# Altium PCB NEW_PCB_2022-07-23.pcbdoc
Units mil, origin at the board's own origin, x right, y up, seen from the top; angles counter-clockwise.
Board outline 2362.21 x 1275.02 mil, 2 copper layers (Top Layer, Bottom Layer); 1 components, 0 nets, 62 pads, 0 vias.
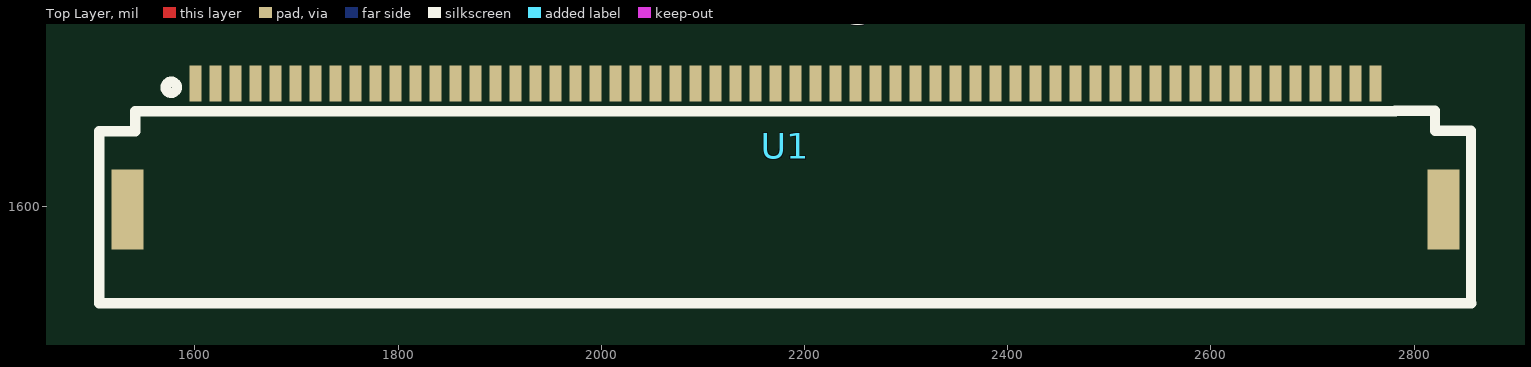
[diagram p0: Top Layer view]
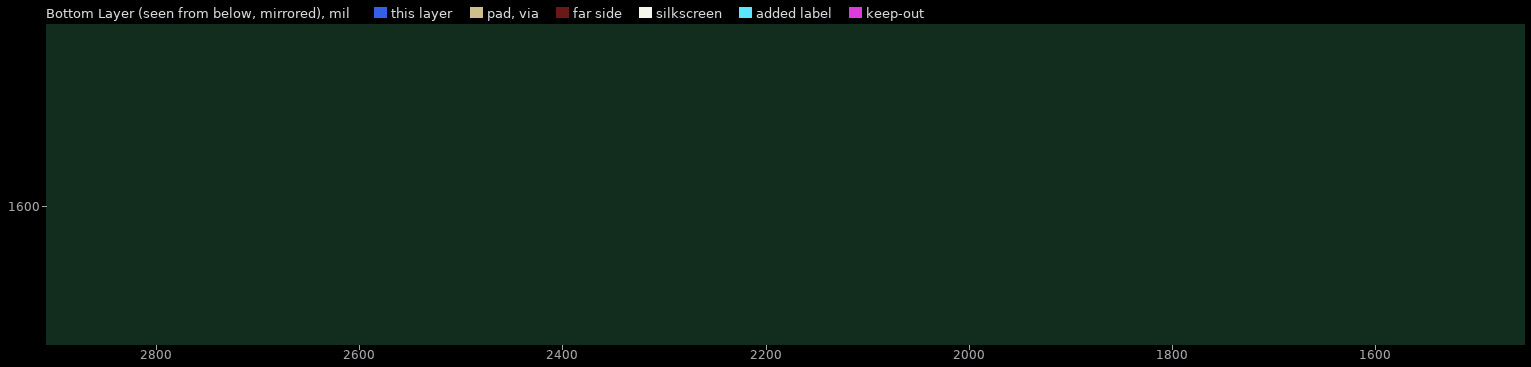
[diagram p1: Bottom Layer view, seen from below]

## Layer stack, top to bottom
Top Solder: solder mask 0.4, Solder Resist, Dk 3.5
Top Layer: signal copper 1.4
Dielectric1: dielectric 12.6, FR-4, Dk 4.8
Bottom Layer: signal copper 1.4
Bottom Solder: solder mask 0.4, Solder Resist, Dk 3.5

## Board outline
3362.21,1000 1000,1000 1000,2275.02 3362.21,2275.02

## Design rules (kind name [scope] priority, off if disabled: settings)
Clearance [All] p1: gap=10 ignorepadtopadclearanceinfootprint=FALSE except(0: Arc-Hole Track-Hole SMDPad-Hole THPad-Hole Via-Hole Fill-Hole Poly-Hole Region-Hole Text-Hole)
PolygonConnect [All] p1: connectstyle=Relief reliefconductorwidth=10 reliefentries=4 polygonreliefangle="90 Angle" airgapwidth=10
RoutingVias [All] p1: holewidth=28 width=50 viastyle="Through Hole" minholewidth=28 minwidth=50 maxholewidth=28 maxwidth=50
SolderMaskExpansion [All] p1: expansion=4
Width [All] p1: maxlimit=10 minlimit=10 preferedwidth=10
30 further rules are at their usual default settings.

## Components (designator, comment, footprint, x,y, rotation, side; value= is the part's Value field where it differs from the comment)
U1 "FPC-SMD_FH52-60S-0.5SH" FPC-SMD_FH52-60S-0.5SH 2181.1,1659.53 r0 top

## Footprints (in the part's own frame and the unit in brackets; to place one, negate y for a bottom-side part, rotate by r counter-clockwise, add the part's x,y. Pads: shape width x height; smd on the part's side, far side on the other; paste and mask are expansions set on the pad)
FPC-SMD_FH52-60S-0.5SH [mm]
  rect 0.3x0.9 smd: 1(-14.75,1.575) 2(-14.25,1.575) 3(-13.75,1.575) 4(-13.25,1.575) 5(-12.75,1.575) 6(-12.25,1.575) 7(-11.75,1.575) 8(-11.25,1.575) 9(-10.75,1.575) 10(-10.25,1.575) 11(-9.75,1.575) 12(-9.25,1.575) 13(-8.75,1.575) 14(-8.25,1.575) 15(-7.75,1.575) 16(-7.25,1.575) 17(-6.75,1.575) 18(-6.25,1.575) 19(-5.75,1.575) 20(-5.25,1.575) 21(-4.75,1.575) 22(-4.25,1.575) 23(-3.75,1.575) 24(-3.25,1.575) 25(-2.75,1.575) 26(-2.25,1.575) 27(-1.75,1.575) 28(-1.25,1.575) 29(-0.75,1.575) 30(-0.25,1.575) 31(0.25,1.575) 32(0.75,1.575) 33(1.25,1.575) 34(1.75,1.575) 35(2.25,1.575) 36(2.75,1.575) 37(3.25,1.575) 38(3.75,1.575) 39(4.25,1.575) 40(4.75,1.575) 41(5.25,1.575) 42(5.75,1.575) 43(6.25,1.575) 44(6.75,1.575) 45(7.25,1.575) 46(7.75,1.575) 47(8.25,1.575) 48(8.75,1.575) 49(9.25,1.575) 50(9.75,1.575) 51(10.25,1.575) 52(10.75,1.575) 53(11.25,1.575) 54(11.75,1.575) 55(12.25,1.575) 56(12.75,1.575) 57(13.25,1.575) 58(13.75,1.575) 59(14.25,1.575) 60(14.75,1.575)
  rect 0.8x2 smd: 61(16.45,-1.575) 62(-16.45,-1.575)
  silkscreen extent -17.15,-3.92 17.15,1.62

## Nets (pads, with @x,y where several pads share a name; then routed paths per layer and width w, separated by ;. In a path a pad name is that pad's centre, name@x,y a point inside that pad or via, vN(x,y) a via of type N, cw(c..) or ccw(c..) an arc to the next point about the centre after c; other vN are vias at no path point)
pads on no net: U1.1 U1.2 U1.3 U1.4 U1.5 U1.6 U1.7 U1.8 U1.9 U1.10 U1.11 U1.12 U1.13 U1.14 U1.15 U1.16 U1.17 U1.18 U1.19 U1.20 U1.21 U1.22 U1.23 U1.24 U1.25 U1.26 U1.27 U1.28 U1.29 U1.30 U1.31 U1.32 U1.33 U1.34 U1.35 U1.36 U1.37 U1.38 U1.39 U1.40 U1.41 U1.42 U1.43 U1.44 U1.45 U1.46 U1.47 U1.48 U1.49 U1.50 U1.51 U1.52 U1.53 U1.54 U1.55 U1.56 U1.57 U1.58 U1.59 U1.60 U1.61 U1.62